# EAGLE board 5mmtermCuringCircuit (EAGLE 9.4.0)
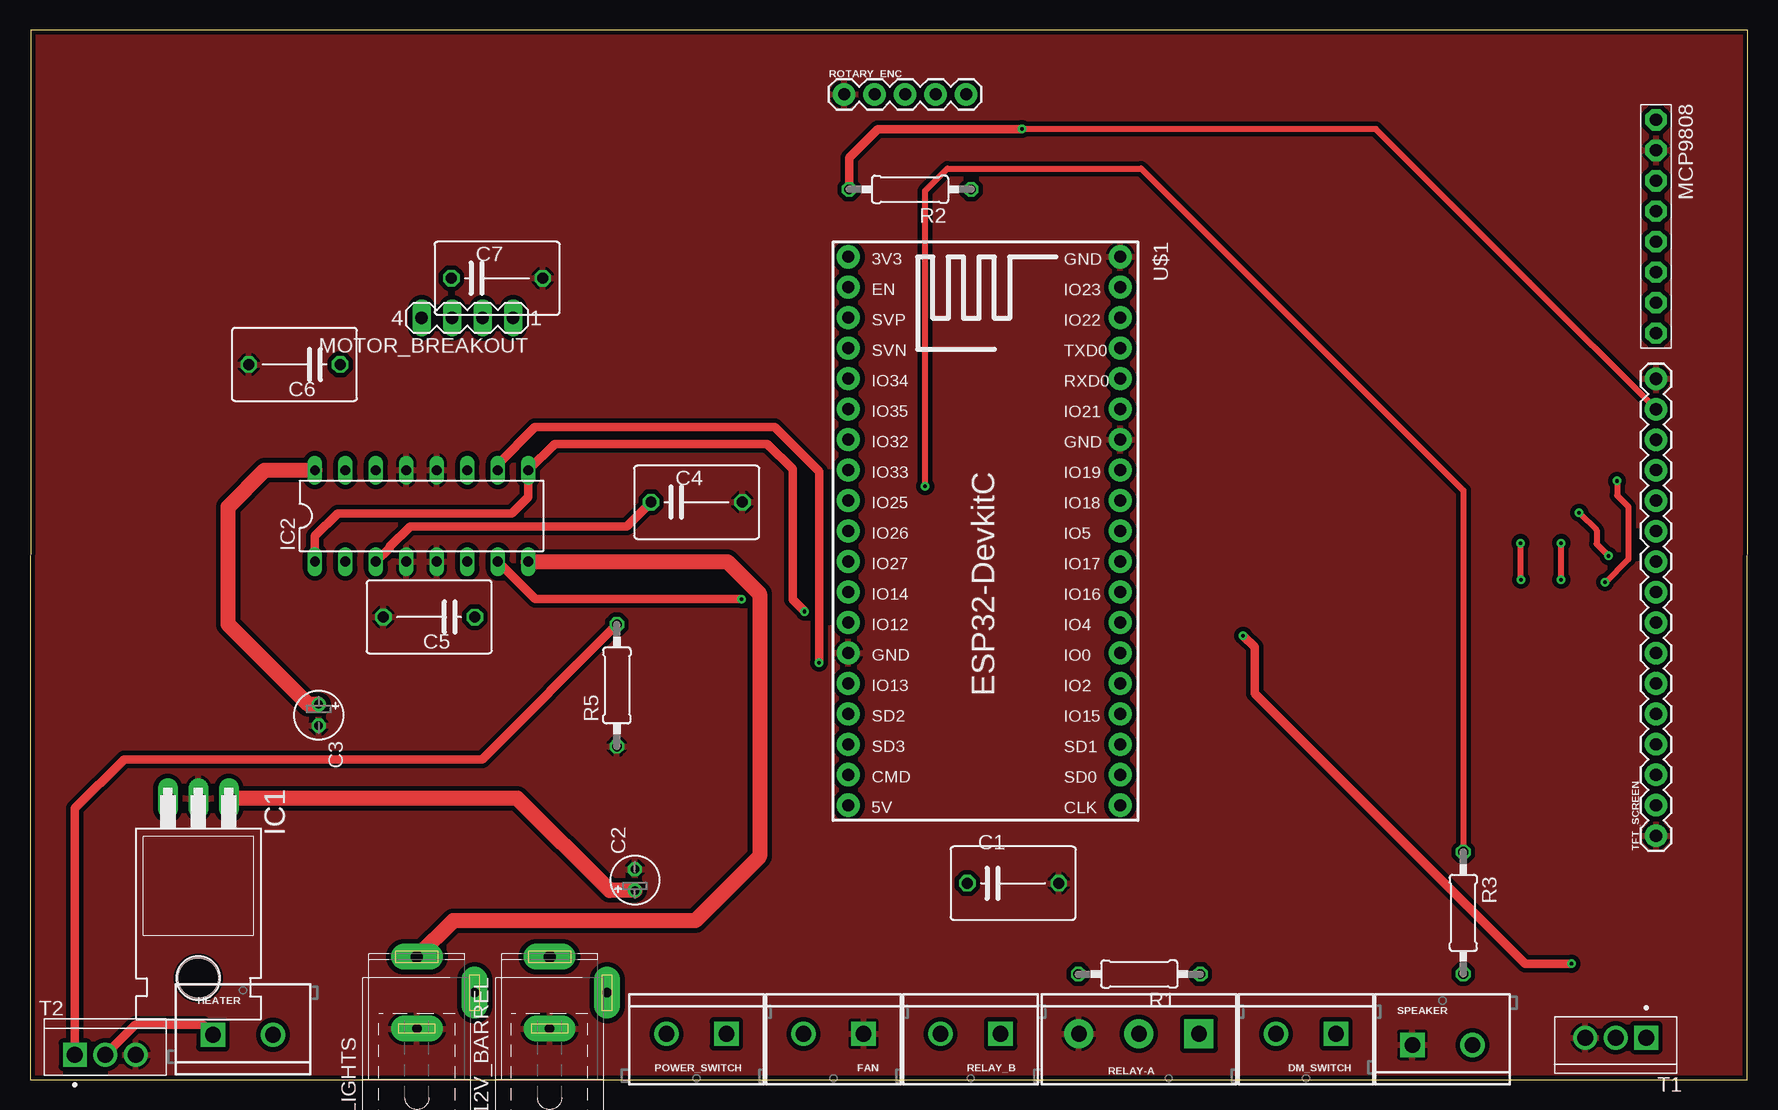
[diagram p0: board, top side]
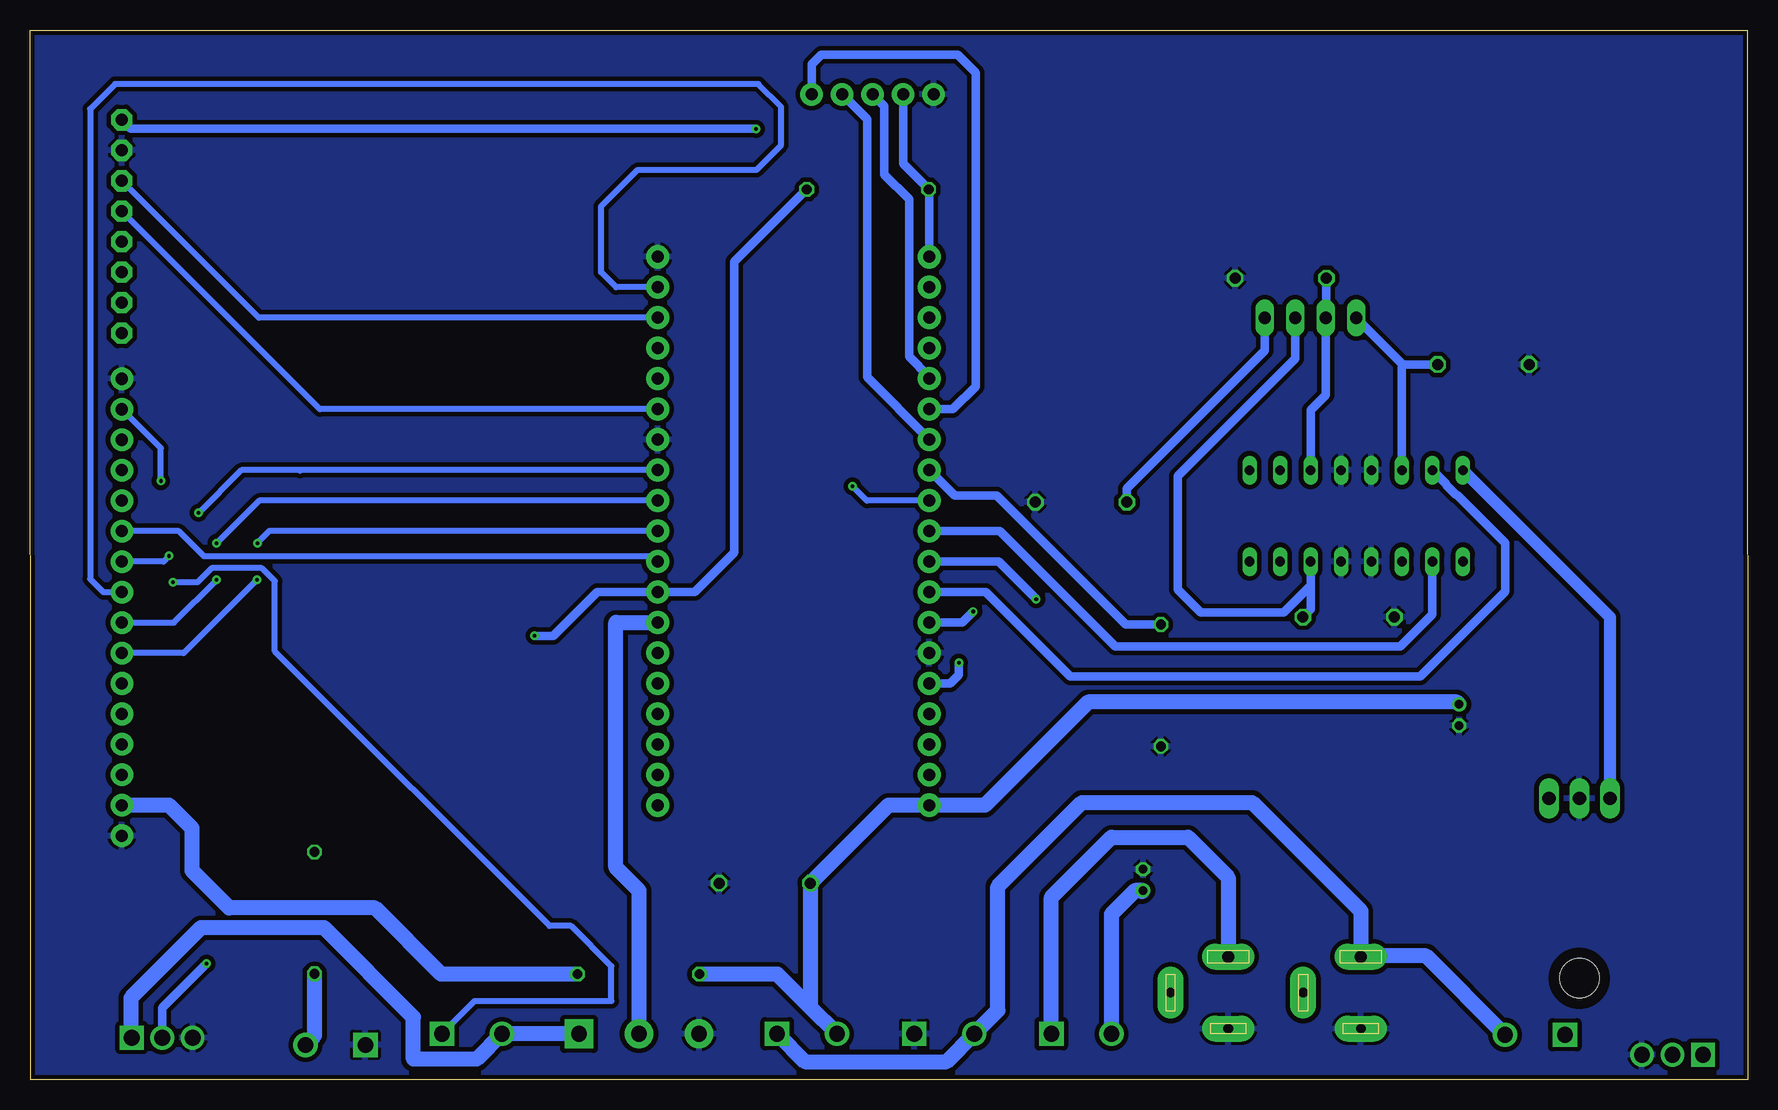
[diagram p1: board, bottom side, seen from below]

Size 143.15 x 87.5 mm. Coordinates in mm from the lower left corner, seen from the top.
Outline: 0,0 143.1,0 143.15,87.5 0.05,87.5 0,0
Copper layers (1*16): Top 0.0178mm / dielectric 59mil / Bottom 0.0178mm
Design rules "epl-lpkf": minimum track width 8mil, minimum drill 0.35mm, track to track 8mil, track to pad 8mil, pad to pad 8mil, via to via 8mil, smd to smd 8mil, copper to edge 15mil, drill to drill 15mil, minimum pad ring 8mil, minimum via ring 8mil, stop-mask expansion 3mil, vias tented up to drill 0mil, thermal gap 10mil
Net classes: 0 default: width 0.508 mm, drill 1.199 mm, clearance 0.381 mm; 1 thick: width 1.27 mm, drill 1.199 mm, clearance 0.381 mm; 2 high current: width 4.318 mm, drill 1.199 mm, clearance 0.381 mm

## Footprints (pad centres in the part's own frame; a part is rotated, then mirrored left to right if it is on the bottom)
SPC4077 = drill 0.8 pad 2.184 long: 1 -3,0; 2 0,-4.8 | drill 1 pad 2.184 long: 3 3,0
C075-063X106 = drill 0.914 octagon: 1 -3.81,0; 2 3.81,0
E1,8-4 = drill 0.711 pad 1.168: + -0.889,0 | drill 0.711 pad 1.168 octagon: - 0.889,0
SCREWTERMINAL-5MM-2 = drill 1.3 pad 2.032 square: 1 0,0 | drill 1.3 pad 2.032: 2 5,0
TO220H = drill 1.118 long: 1 -2.54,-10.16; 2 0,-10.16; 3 2.54,-10.16 | hole 3.302: 0,4.826
DIL16 = drill 0.813 long: 1 -8.89,-3.81; 2 -6.35,-3.81; 3 -3.81,-3.81; 4 -1.27,-3.81; 5 1.27,-3.81; 6 3.81,-3.81; 7 6.35,-3.81; 8 8.89,-3.81; 9 8.89,3.81; 10 6.35,3.81; 11 3.81,3.81; 12 1.27,3.81; 13 -1.27,3.81; 14 -3.81,3.81; 15 -6.35,3.81; 16 -8.89,3.81
1X08-BIG = drill 1.016 pad 1.778 octagon: 1 -8.89,0; 2 -6.35,0; 3 -3.81,0; 4 -1.27,0; 5 1.27,0; 6 3.81,0; 7 6.35,0; 8 8.89,0
MA04-1 = drill 1.016 long: 1 -3.81,0; 2 -1.27,0; 3 1.27,0; 4 3.81,0
0207/10 = drill 0.813 octagon: 1 -5.08,0; 2 5.08,0
SCREWTERMINAL-5MM-3 = drill 1.3 pad 2.413 square: 1 0,0 | drill 1.3 pad 2.413: 2 5,0; 3 10,0
1X05 = drill 1.016 pad 1.88: 1 0,0; 2 2.54,0; 3 5.08,0; 4 7.62,0; 5 10.16,0
TRANS_RFP30N06LE = drill 1.32 square: 1 -2.54,0 | drill 1.32: 2 0,0; 3 2.54,0
1X16 = drill 1.016 pad 1.88: 1 0,0; 2 2.54,0; 3 5.08,0; 4 7.62,0; 5 10.16,0; 6 12.7,0; 7 15.24,0; 8 17.78,0; 9 20.32,0; 10 22.86,0; 11 25.4,0; 12 27.94,0; 13 30.48,0; 14 33.02,0; 15 35.56,0; 16 38.1,0
ESP32-DEVKITC = drill 1 pad 1.93: 1 -22.87,-11.42; 2 -20.33,-11.42; 3 -17.79,-11.42; 4 -15.25,-11.42; 5 -12.71,-11.42; 6 -10.17,-11.42; 7 -7.63,-11.42; 8 -5.09,-11.42; 9 -2.55,-11.42; 10 -0.01,-11.42; 11 2.53,-11.42; 12 5.07,-11.42; 13 7.61,-11.42; 14 10.15,-11.42; 15 12.69,-11.42; 16 15.23,-11.42; 17 17.77,-11.42; 18 20.31,-11.42; 19 22.85,-11.42; 20 22.85,11.23; 21 20.31,11.23; 22 17.77,11.23; 23 15.23,11.23; 24 12.69,11.23; 25 10.15,11.23; 26 7.61,11.23; 27 5.07,11.23; 28 2.53,11.23; 29 -0.01,11.23; 30 -2.55,11.23; 31 -5.09,11.23; 32 -7.63,11.23; 33 -10.17,11.23; 34 -12.71,11.23; 35 -15.25,11.23; 36 -17.79,11.23; 37 -20.33,11.23; 38 -22.87,11.23

## Placement (x,y rotation side)
12V_BARREL  [SPC4077]  43.3,7.24 90 top
C1  .1uF  [C075-063X106]  81.92,16.37 0 top
C2  10uF  [E1,8-4]  50.4,16.64 90 top
C3  10uF  [E1,8-4]  24.06,30.39 270 top
C4  0.1u  [C075-063X106]  55.56,48.13 0 top
C5  0.1u  [C075-063X106]  33.26,38.56 180 top
C6  0.1u  [C075-063X106]  22.04,59.61 180 top
C7  0.1u  [C075-063X106]  38.92,66.81 0 top
DM_SWITCH  [SCREWTERMINAL-5MM-2]  108.83,3.81 180 top
FAN  [SCREWTERMINAL-5MM-2]  69.46,3.81 180 top
HEATER  [SCREWTERMINAL-5MM-2]  15.24,3.73 0 top
IC1  7805T  [TO220H]  14.03,13.28 180 top
IC2  L293D  [DIL16]  32.63,46.99 0 top
LIGHTS  [SPC4077]  32.25,7.24 90 top
MCP9808  [1X08-BIG]  135.5,71.12 270 top
MOTOR_BREAKOUT  [MA04-1]  36.44,63.5 180 top
POWER_SWITCH  [SCREWTERMINAL-5MM-2]  58.03,3.81 180 top
R1  220  [0207/10]  92.44,8.79 180 top
R2  10k  [0207/10]  73.34,74.21 180 top
R3  220  [0207/10]  119.44,13.89 270 top
R5  10k  [0207/10]  48.91,32.86 90 top
RELAY-A  [SCREWTERMINAL-5MM-3]  97.4,3.81 180 top
RELAY_B  [SCREWTERMINAL-5MM-2]  80.89,3.81 180 top
ROTARY_ENC  [1X05]  67.85,82.14 0 top
SPEAKER  [SCREWTERMINAL-5MM-2]  115.2,2.89 0 top
T1  RFP30N06LE  [TRANS_RFP30N06LE]  132.14,3.49 180 top
T2  RFP30N06LE  [TRANS_RFP30N06LE]  6.28,2.07 0 top
TFT_SCREEN  [1X16]  135.5,20.32 90 top
U$1  ESP32DEVKITC  [ESP32-DEVKITC]  79.62,45.72 270 top

## Library data of the parts
12V_BARREL LIGHTS = con-jack; OC_FARNELL: unknown; OC_NEWARK: unknown
C1-C7 = rcl; SPICEPREFIX: C
DM_SWITCH FAN HEATER POWER_SWITCH RELAY_B SPEAKER = SparkFun-Connectors; SF_SKU: PRT-08432
IC1 = linear
IC2 = st-microelectronics; MPN: L293D; OC_FARNELL: 9589619; OC_NEWARK: 56P8249
MCP9808 = adafruit
MOTOR_BREAKOUT = con-lstb; OC_FARNELL: unknown; OC_NEWARK: unknown
R1-R3 R5 = rcl; SPICEPREFIX: R
RELAY-A = SparkFun-Connectors; PROD_ID: CONN-10134; SF_SKU: PRT-08433
ROTARY_ENC TFT_SCREEN = SparkFun-Connectors
T1 T2 = RFP30N06LE; AVAILABILITY: Unavailable; MF: ON Semiconductor; MP: RFP30N06LE; PACKAGE: TO-220 Intersil; PRICE: None
U$1 = ESP32-DEVKITC

## Nets
12V [thick]: C2.+ IC1.1 POWER_SWITCH.2
+3V3: DM_SWITCH.1 MCP9808.1 R2.2 ROTARY_ENC.2 TFT_SCREEN.15 U$1.1
+5V: C1.1 C3.+ IC1.3 IC2.16 R1.2 RELAY_B.2 U$1.19
GND: 12V_BARREL.1 C1.2 C2.- C3.- C4.2 C5.2 C6.2 C7.2 FAN.1 IC1.2 IC2.4 IC2.5 IC2.12 IC2.13 LIGHTS.1 MCP9808.2 R5.1 RELAY-A.3 ROTARY_ENC.1 SPEAKER.1 T1.3 T2.3 TFT_SCREEN.1 TFT_SCREEN.16 U$1.14 U$1.32 U$1.38
N$1: TFT_SCREEN.9 U$1.37
N$2: IC2.15 U$1.12
N$3 [thick]: 12V_BARREL.3 POWER_SWITCH.1
N$4: HEATER.1 T2.2
N$5: IC2.7 U$1.11
N$6: R3.2 SPEAKER.2
N$7: C5.1 IC2.6 MOTOR_BREAKOUT.2
N$8: DM_SWITCH.2 RELAY-A.1 T1.1
N$9: R2.1 T1.2 U$1.27
N$10: MCP9808.3 U$1.36
N$11: MCP9808.4 U$1.33
N$12: IC2.1 IC2.9 U$1.13
N$13: IC2.2 U$1.10
N$14: R5.2 T2.1 U$1.8
N$15: C4.1 IC2.3 MOTOR_BREAKOUT.1
N$16: RELAY-A.2 U$1.26
N$17: R1.1 TFT_SCREEN.2
N$18: ROTARY_ENC.3 U$1.5
N$19: ROTARY_ENC.4 U$1.7
N$20: ROTARY_ENC.5 U$1.6
N$21: TFT_SCREEN.11 U$1.28
N$22: TFT_SCREEN.10 U$1.31
N$23: C7.1 IC2.11 MOTOR_BREAKOUT.3
N$24: TFT_SCREEN.8 U$1.30
N$25: TFT_SCREEN.7 U$1.29
N$26: R3.1 U$1.9
N$27: C6.1 IC2.14 MOTOR_BREAKOUT.4
N$29: IC2.10 U$1.15
RELAY_NO [thick]: FAN.2 HEATER.2 IC2.8 LIGHTS.3 RELAY_B.1

## Tracks (layer width: path | path; a pad name or v marks a point on that pad's centre or on a via)
12V
  Top 1.27: C2.+ 48.3,15.75 40.61,23.44 IC1.1
  Bottom 1.27: POWER_SWITCH.2 53.03,13.77 51.05,15.75 C2.+ 50.5,15.65
+3V3  (via drill 0.3 pad 0.3)
  Top 0.508: v132.25,49.9 132.25,48.7 133.19,47.76 133.19,43.39 v131.25,41.45 | TFT_SCREEN.15 124.95,66.43 124.95,66.45 112.15,79.25 v82.65,79.25
  Top 0.7: v82.65,79.25 70.65,79.25 68.26,76.86 R2.2
  Bottom 0.508: DM_SWITCH.1 106.09,6.55 94.7,6.55 94.7,9.45 98.05,12.8 99.85,12.8 122.75,35.7 122.75,41.55 123.84,42.64 128.01,42.64 129.2,41.45 v131.25,41.45 | v132.25,49.9 132.25,52.63 TFT_SCREEN.15
  Bottom 0.7: U$1.1 68.2,74.15 R2.2 70.39,76.34 ROTARY_ENC.2 | MCP9808.1 134.75,79.26 v82.66,79.26 v82.65,79.25
+5V
  Top 1.27: IC2.16 19.55,50.8 16.5,47.75 16.5,37.95 23.17,31.28 C3.+
  Bottom 1.016: IC2.16 11.49,38.55 IC1.3
  Bottom 1.27: C3.+ 24.25,31.47 54.98,31.47 63.58,22.87 U$1.19 71.61,22.87 C1.1 78.11,6.03 | RELAY_B.2 78.11,6.03 | 78.11,6.03 80.87,8.79 R1.2
GND
  pour Top: 0.05,87.45 0.05,0 143.1,0 143.1,87.45
  pour Bottom: 0.05,87.45 0.05,0 0.05,0 143.1,0 143.1,87.45
N$1
  Bottom 0.508: U$1.37 94.3,66.05 95.55,67.3 95.55,72.8 92.5,75.85 82.6,75.85 80.55,77.9 80.55,81.1 82.45,83 136.05,83 138.15,80.9 138.15,41.75 137.04,40.64 TFT_SCREEN.9
N$2
  Bottom 0.7: IC2.15 25.13,49.65 25.13,49.56 24.32,48.75 24.23,48.75 20.2,44.72 20.2,40.7 27.3,33.6 56.45,33.6 63.5,40.65 U$1.12
N$3
  Bottom 1.27: POWER_SWITCH.1 58.03,15.2 55.93,17.3 | 55.93,17.3 55.9,17.3 | 55.93,17.3 53.03,20.2 46.65,20.2 43.3,16.85 12V_BARREL.3
N$4
  Top 0.7: T2.2 8.76,4.55 14.42,4.55 HEATER.1
N$5  (via drill 0.3)
  Top 0.7: U$1.11 | IC2.7 42.11,40.05 v59.3,40.05
  Bottom 0.7: v59.3,40.05 62.44,43.19 U$1.11
N$6
  Bottom 1.27: SPEAKER.2 119.44,3.65 R3.2
N$7
  Bottom 0.7: MOTOR_BREAKOUT.2 37.71,60.09 47.5,50.3 47.5,40.85 45.6,38.95 38.67,38.95 36.44,41.18 IC2.6 36.44,39.19 C5.1
N$8
  Bottom 1.27: RELAY-A.1 DM_SWITCH.2 105.94,1.7 111.2,1.7 111.2,5.2 118.65,12.65 128.9,12.65 134.75,6.8 134.75,3.56 T1.1
N$9  (via drill 0.3 pad 0.3)
  Top 0.7: v128.45,9.65 124.6,9.65 102.05,32.2 102.05,36.05 v101.1,37
  Bottom 0.7: R2.1 84.45,68.18 84.45,43.95 87.75,40.65 U$1.27 | v128.45,9.65 132.14,5.96 T1.2 | v101.1,37 99.55,37 95.9,40.65 U$1.27 | U$1.27 90.75,40.55
N$10
  Bottom 0.508: U$1.36 124.08,63.51 MCP9808.3
N$11
  Bottom 0.508: U$1.33 119,55.89 MCP9808.4
N$12  (via drill 0.3)
  Top 0.7: IC2.1 23.74,45.3 25.64,47.2 40.15,47.2 41.52,48.57 IC2.9 43.72,53 61.45,53 63.55,50.9 63.55,40.02 v64.55,39.02
  Bottom 0.7: v64.55,39.02 65.46,38.11 U$1.13
N$13
  Bottom 0.7: IC2.2 26.28,38.77 28.95,36.1 52.7,36.1 62.33,45.73 U$1.10
N$14
  Top 0.7: R5.2 37.67,26.7 7.85,26.7 3.74,22.59 T2.1
  Bottom 0.7: U$1.8 66.09,48.7 62.6,48.7 51.84,37.94 R5.2
N$15
  Top 0.7: IC2.3 29.97,44.33 29.97,44.42 31.67,46.12 49.74,46.12 C4.1
  Bottom 0.7: C4.1 51.75,49.28 40.25,60.78 MOTOR_BREAKOUT.1
N$16
  Bottom 1.27: RELAY-A.2 92.4,15.75 94.33,17.68 94.33,38.12 94.31,38.11 U$1.26
N$17
  Bottom 1.27: TFT_SCREEN.2 131.56,22.86 129.65,20.95 129.65,17.4 126.55,14.3 114.4,14.3 108.89,8.79 R1.1
N$18
  Bottom 0.7: ROTARY_ENC.3 71.95,81.16 71.95,75.45 69.9,73.4 69.9,60.27 68.2,58.57 U$1.5
N$19
  Bottom 0.7: ROTARY_ENC.4 73.4,80.07 73.4,58.55 U$1.7
N$20
  Bottom 0.7: U$1.6 66.25,55.89 64.35,57.79 64.35,83.95 65.85,85.45 77.2,85.45 78.01,84.64 ROTARY_ENC.5
N$21
  Bottom 0.508: U$1.28 91.3,43.64 128.67,43.64 130.75,45.72 TFT_SCREEN.11
N$22  (via drill 0.3 pad 0.3)
  Top 0.508: v129.1,47.25 130.55,45.8 130.55,44.65 v131.55,43.65
  Bottom 0.508: U$1.31 120.59,50.81 | 120.59,50.81 120.65,50.75 | 120.59,50.81 125.54,50.81 v129.1,47.25 | v131.55,43.65 132.02,43.18 TFT_SCREEN.10
N$23
  Bottom 0.7: IC2.11 36.44,55.81 35.17,57.08 MOTOR_BREAKOUT.3 35.11,63.56 C7.1
N$24  (via drill 0.3 pad 0.3)
  Top 0.508: v127.6,41.66 v127.6,44.72
  Bottom 0.508: U$1.30 124.05,48.27 v127.6,44.72 | TFT_SCREEN.8 131.16,38.1 v127.6,41.66
N$25  (via drill 0.3 pad 0.3)
  Top 0.508: v124.2,44.72 124.2,41.7 v124.24,41.66 v124.25,41.66
  Bottom 0.508: U$1.29 121.03,45.73 | 121.03,45.73 121.05,45.75 | 121.03,45.73 123.19,45.73 v124.2,44.72 | v124.25,41.66 130.35,35.56 TFT_SCREEN.7
N$26  (via drill 0.3 pad 0.3)
  Top 0.508: v74.6,49.45 74.6,74.1 76.45,75.95 92.6,75.95 119.44,49.11 R3.1
  Bottom 0.508: U$1.9 73.42,48.27 v74.6,49.45
N$27
  Bottom 0.7: MOTOR_BREAKOUT.4 28.82,59.69 | 28.82,59.69 IC2.14 | 28.82,59.69 28.74,59.61 C6.1
N$29  (via drill 0.3 pad 0.3)
  Top 0.7: IC2.10 38.98,51.28 42.08,54.38 62.07,54.38 65.75,50.7 v65.75,34.75
  Bottom 0.7: U$1.15 66.45,33.03 65.75,33.73 v65.75,34.75
RELAY_NO
  Top 1.27: LIGHTS.3 35.26,13.25 55.45,13.25 60.8,18.6 60.8,40.49 58.11,43.18 IC2.8
  Bottom 1.27: HEATER.2 26.81,10.3 32.19,10.3 LIGHTS.3 32.25,14.05 41.3,23.1 55.5,23.1 62.5,16.1 62.5,5.77 FAN.2 66.77,1.5 78.58,1.5 RELAY_B.1